# EAGLE board debouncer (EAGLE 6.2)
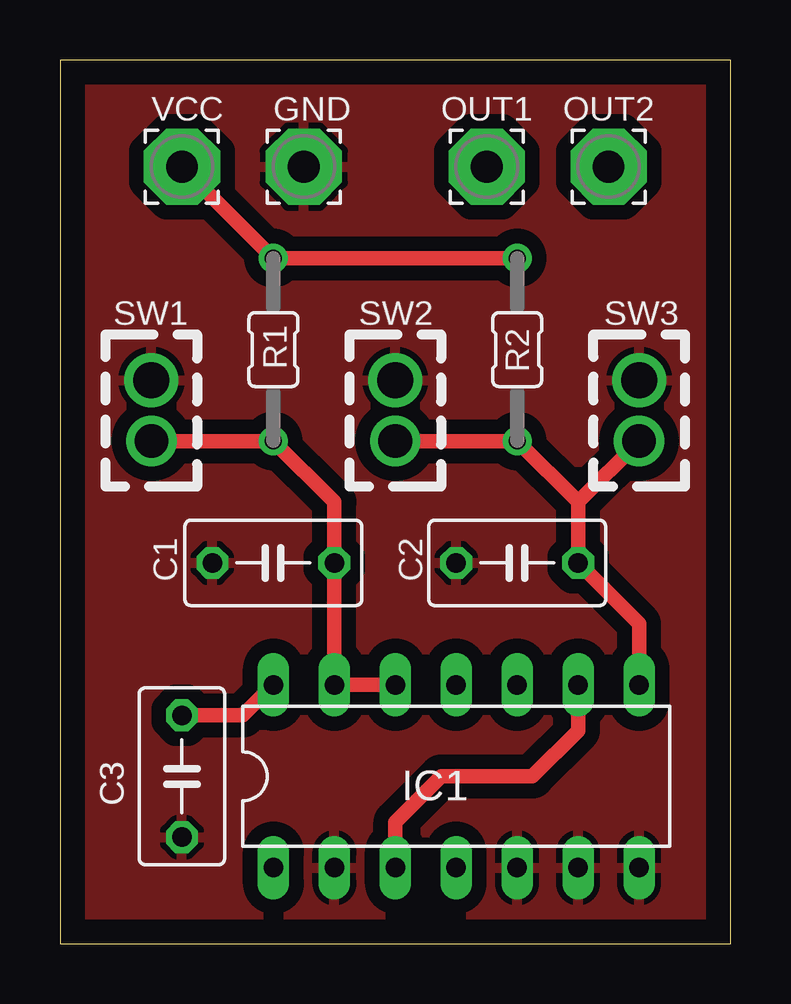
[diagram p0: board, top side]
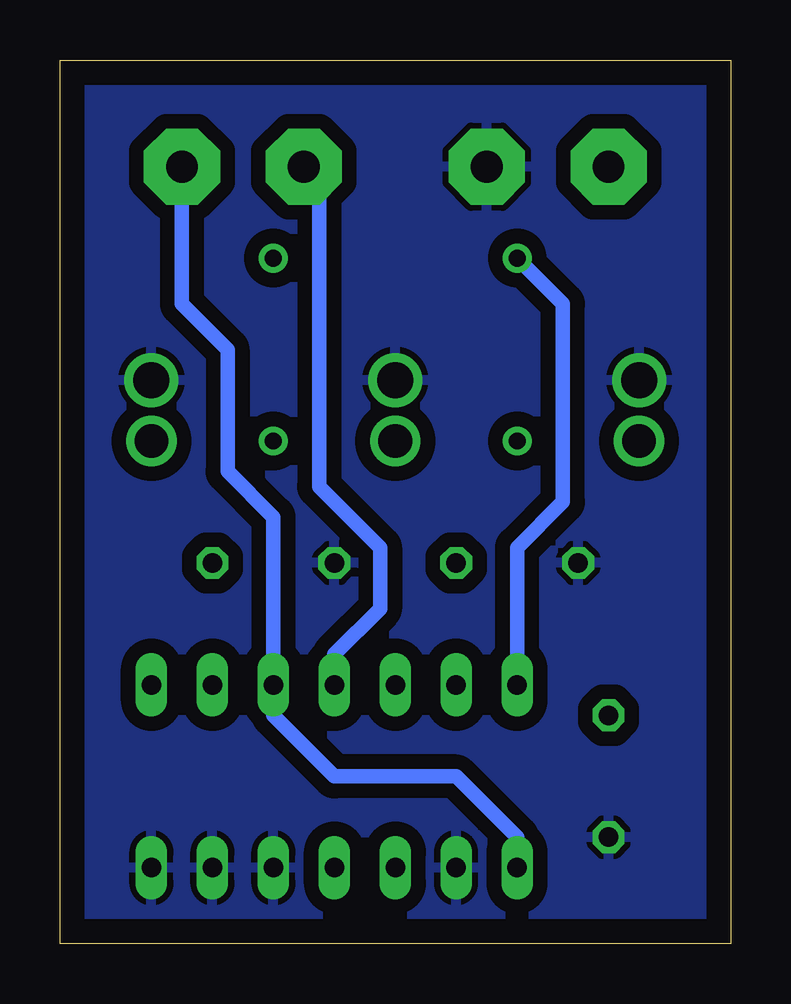
[diagram p1: board, bottom side, seen from below]

Size 27.94 x 36.83 mm. Coordinates in mm from the lower left corner, seen from the top.
Outline: 0,0 27.94,0 27.94,36.83 0,36.83 0,0
Copper layers (1*16): Top 0.035mm / dielectric 1.5mm / Bottom 0.035mm
Design rules: minimum track width 10mil, minimum drill 24mil, track to track 8mil, track to pad 8mil, pad to pad 8mil, via to via 8mil, smd to smd 8mil, copper to edge 40mil, drill to drill 8mil, minimum pad ring 10mil, minimum via ring 8mil, stop-mask expansion 4mil, vias tented up to drill 0mil, thermal gap 10mil

## Footprints (pad centres in the part's own frame; a part is rotated, then mirrored left to right if it is on the bottom)
CERAMIC_CAP = drill 0.813 octagon: 1 -2.54,0; 2 2.54,0
3,17/1,3 = drill 1.321 pad 3.175 octagon: 1 0,0
DIL14 = drill 0.813 long: 1 -7.62,-3.81; 2 -5.08,-3.81; 3 -2.54,-3.81; 4 0,-3.81; 5 2.54,-3.81; 6 5.08,-3.81; 7 7.62,-3.81; 8 7.62,3.81; 9 5.08,3.81; 10 2.54,3.81; 11 0,3.81; 12 -2.54,3.81; 13 -5.08,3.81; 14 -7.62,3.81
R0204/3 = drill 0.7: 1 -3.81,0; 2 3.81,0
MOMENTARY_SW_SMALL = drill 1.5: P$1 -1.27,0 | drill 1.4: P$2 1.27,0

## Placement (x,y rotation side)
C1  CERAMIC_CAPACITOR  [CERAMIC_CAP]  8.89,15.88 180 top
C2  CERAMIC_CAPACITOR  [CERAMIC_CAP]  19.05,15.88 180 top
C3  CERAMIC_CAPACITOR  [CERAMIC_CAP]  5.08,6.99 270 top
GND  WIREPAD3,17/1,3  [3,17/1,3]  10.16,32.38 0 top
IC1  4093N  [DIL14]  16.51,6.99 0 top
PAD1  WIREPAD3,17/1,3  [3,17/1,3]  17.78,32.38 0 top
PAD2  WIREPAD3,17/1,3  [3,17/1,3]  22.86,32.38 0 top
R1  3MM.3  [R0204/3]  8.89,24.77 90 top
R2  3MM.3  [R0204/3]  19.05,24.77 90 top
SW1  MOMENTARY_SW_SMALL  [MOMENTARY_SW_SMALL]  3.81,22.23 270 top
SW2  MOMENTARY_SW_SMALL  [MOMENTARY_SW_SMALL]  13.97,22.23 270 top
SW3  MOMENTARY_SW_SMALL  [MOMENTARY_SW_SMALL]  24.13,22.23 270 top
VCC  WIREPAD3,17/1,3  [3,17/1,3]  5.08,32.38 0 top

## Library data of the parts
C1-C3 SW1-SW3 = 00_steve
GND PAD1 PAD2 VCC = wirepad
IC1 = 40xx
R1 R2 = gm-resistors

## Nets
GND: C1.2 C2.2 C3.2 GND.1 IC1.2 IC1.5 IC1.6 IC1.7 SW1.P$1 SW2.P$1 SW3.P$1
N$1: C2.1 IC1.8 R2.1 SW2.P$2 SW3.P$2
N$2: IC1.3 IC1.9
N$3: C1.1 IC1.12 IC1.13 R1.1 SW1.P$2
N$4: IC1.11 PAD1.1
N$5: IC1.1 IC1.10 PAD2.1
VCC: C3.1 IC1.14 R1.2 R2.2 VCC.1

## Tracks (layer width: path | path; a pad name or v marks a point on that pad's centre or on a via)
GND
  pour Top (isolate 0.61): 0,36.83 27.94,36.83 27.94,0 0,0
  pour Bottom (isolate 0.61): 0,36.83 27.94,36.83 27.94,0 0,0
N$1
  Top 0.61: IC1.8 24.13,13.34 C2.1 21.59,18.41 | 21.59,18.41 SW3.P$2 | SW2.P$2 R2.1 21.59,18.41
N$2
  Top 0.61: IC1.3 13.97,5.08 15.88,6.99 19.68,6.99 21.59,8.89 IC1.9
N$3
  Top 0.61: IC1.12 IC1.13 C1.1 11.43,18.41 R1.1 SW1.P$2
N$4
  Bottom 0.61: PAD1.1 17.14,31.75 17.14,19.05 14.61,16.51 14.61,13.97 16.51,12.06 IC1.11
N$5
  Bottom 0.61: IC1.1 8.89,4.45 11.43,6.99 16.51,6.99 19.05,9.53 IC1.10 19.05,17.78 20.95,19.68 20.95,24.77 22.86,26.67 PAD2.1
VCC
  Top 0.61: C3.1 7.62,9.53 IC1.14 | VCC.1 R1.2 R2.2
  Bottom 0.61: IC1.14 8.89,16.51 6.99,18.41 6.99,26.67 R1.2

## Text on the board
tPlace: VCC | GND | OUT1 | OUT2 | SW1 | R1 | SW2 | R2 | SW3 | C1 | C2 | C3 | C3